# Altium PCB PCB-NW0101 Rev.B.PcbDoc (part 2 of 3)
Units mil, origin at the board's own origin, x right, y up, seen from the top; angles counter-clockwise.
Board outline 787.4 x 1377.95 mil, 6 copper layers (Top, GND, Inner3, Inner4, PWR, Bottom), stack 29.136 mil thick; 119 components, 126 nets, 561 pads, 474 vias.
Unrouted connection lines stored in the file: 214.
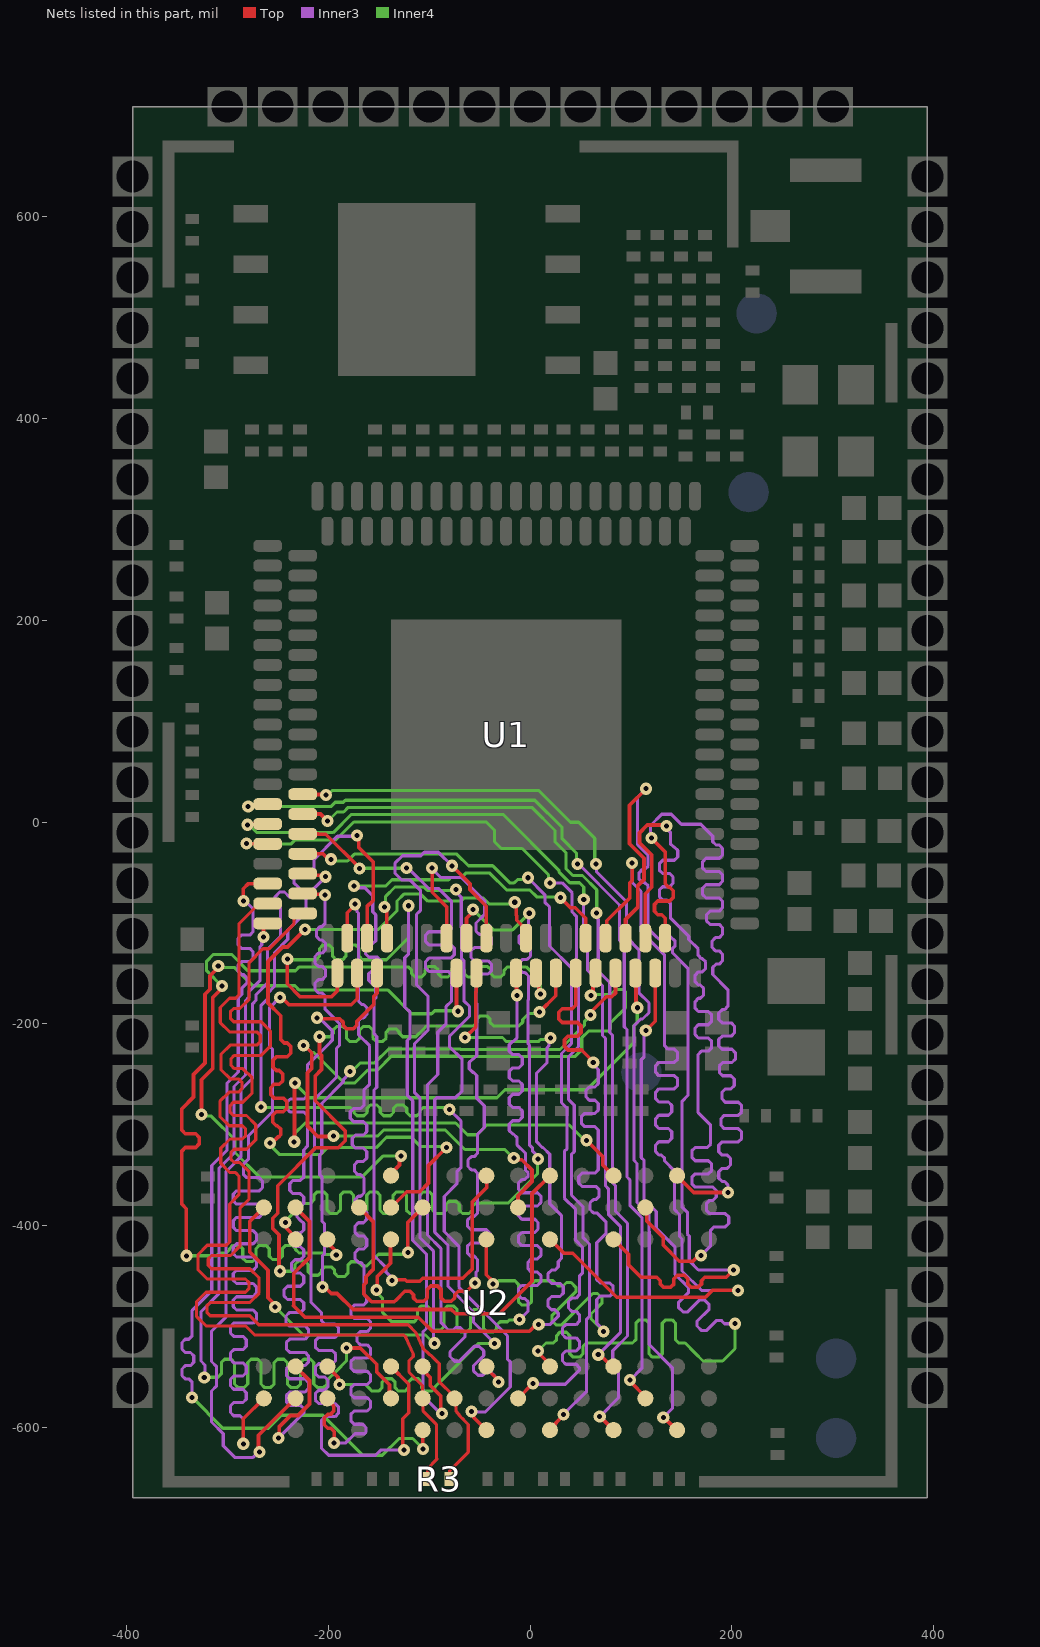
[diagram p6: the nets of this part, all layers, seen from the top]

## Via types
v1: diameter 12/12/12/12 (per signal layer), hole 5, Top to Bottom, tented both sides, 474 vias

## Nets (pads, with @x,y where several pads share a name; then routed paths per layer and width w, separated by ;. In a path a pad name is that pad's centre, name@x,y a point inside that pad or via, vN(x,y) a via of type N, cw(c..) or ccw(c..) an arc to the next point about the centre after c; other vN are vias at no path point) (continued)
DDR_A4: U1.82 U2.N8 | length 906.7
  Top w3.63: U2.N8@-200.79,-570.87 -200.79,-571.79 -200.79,-572.26 -194.45,-578.6 -194.45,-583.55 -197.73,-586.83 -200.46,-586.83 -203.87,-590.24 -203.87,-597.05 -200.46,-600.46 -197.28,-600.46 -193.87,-603.87 -193.87,-605.69 -193.87,-614.65 v1(-194.22,-615) ; U1.82@-181.1,-114.96 -181.1,-89.82 -173.3,-82.02 v1(-173.3,-81.43)
  Inner3 w3.1: v1(-194.22,-615) -182.41,-615 -173.41,-606 -164,-606 -162.45,-604.45 -162.45,-599.82 -165.72,-596.54 -174.24,-596.54 -177.51,-593.27 -177.51,-586.72 -174.24,-583.44 -161.37,-583.44 -158.1,-580.16 -158.1,-573.61 -161.37,-570.34 -174.24,-570.34 -177.51,-567.06 -177.51,-560.51 -174.24,-557.24 -161.37,-557.24 -158.1,-553.96 -158.1,-547.41 -161.37,-544.14 -174.24,-544.14 -177.51,-540.86 -177.51,-534.31 -174.24,-531.03 -161.37,-531.03 -158.1,-527.76 -158.1,-521.21 -161.37,-517.93 -168.17,-517.93 -171.45,-514.66 -171.45,-508.11 -168.17,-504.83 -161.37,-504.83 -158.1,-501.56 -158.1,-495 -161.37,-491.73 -174.24,-491.73 -177.51,-488.45 -177.51,-481.9 -174.24,-478.63 -165.01,-478.63 -161.73,-475.35 -161.73,-471 -164.56,-468.18 -164.56,-441.05 -164.56,-439.5 -167.83,-436.23 -170.05,-436.23 -173.33,-432.95 -173.33,-426.4 -170.05,-423.13 -165.01,-423.13 -161.73,-419.85 -161.73,-413.3 -165.01,-410.02 -170.05,-410.02 -173.33,-406.75 -173.33,-400.2 -170.05,-396.92 -165.01,-396.92 -161.73,-393.65 -161.73,-387.1 -165.01,-383.82 -170.05,-383.82 -173.33,-380.55 -173.33,-373.99 -170.05,-370.72 -167.83,-370.72 -164.56,-367.44 -164.56,-358.25 -164.56,-354.14 -164.56,-352.58 -167.83,-349.31 -170.62,-349.31 -173.9,-346.03 -173.9,-339.48 -170.62,-336.21 -165.01,-336.21 -161.73,-332.93 -161.73,-326.38 -165.01,-323.11 -172.9,-323.11 -176.17,-319.83 -176.17,-313.28 -172.9,-310 -165.01,-310 -161.73,-306.73 -161.73,-300.18 -165.01,-296.9 -174.82,-296.9 -178.09,-293.63 -178.09,-287.08 -174.82,-283.8 -167.83,-283.8 -164.56,-280.53 -164.56,-271.58 -164.56,-265.34 -158.96,-259.74 -158.96,-221.71 -168.89,-211.78 -169.97,-210.69 -169.97,-197.12 -166.7,-193.85 -164.86,-193.85 -161.58,-190.57 -161.58,-184.02 -164.86,-180.75 -166.7,-180.75 -169.97,-177.47 -169.97,-132.12 -169.97,-90.08 -171.6,-88.45 -171.6,-83.13 v1(-173.3,-81.43)
DDR_A5: U1.93 U2.N3 | length 848.8
  Top w3.63: v1(-340.5,-429.71) -340.5,-383.05 -344.89,-378.66 -344.89,-341.29 -344.89,-325.84 -341.48,-322.43 -331.24,-322.43 -327.84,-319.02 -327.84,-312.2 -331.24,-308.79 -341.48,-308.79 -344.89,-305.39 -344.89,-298.4 -344.89,-283.98 -333.41,-272.5 -333.41,-250.13 -321.94,-238.65 -321.94,-170.72 -317.02,-165.8 -317.02,-152.2 -308.86,-144.04 v1(-308.86,-142.66) ; U2.N3@-200.09,-413 -200.09,-417.43 -193.58,-423.94 -193.58,-427.52 v1(-191.98,-429.12) ; U1.93@-72.83,-149.6 -72.83,-186.18 v1(-71.54,-187.47)
  Inner4 w3.09: v1(-340.5,-429.71) -310.71,-429.71 -308,-427 -302.47,-427 -300.93,-427 -297.66,-423.73 -297.66,-422.71 -294.38,-419.44 -287.84,-419.44 -284.57,-422.71 -284.57,-432.1 -281.3,-435.37 -274.75,-435.37 -271.48,-432.1 -271.48,-422.71 -268.21,-419.44 -261.67,-419.44 -258.4,-422.71 -258.4,-430.19 -255.12,-433.46 -248.58,-433.46 -245.31,-430.19 -245.31,-422.71 -242.04,-419.44 -235.49,-419.44 -232.22,-422.71 -232.22,-423.73 -228.95,-427 -227.29,-427 -204.15,-427 -202.61,-428.54 -192.55,-428.54 v1(-191.98,-429.12) ; v1(-308.86,-142.66) -307.52,-144 -292.88,-144 -274.65,-162.22 -232.81,-162.22 -228.47,-166.57 -140.54,-166.57 -128.96,-178.15 -128.96,-178.37 -117.38,-189.95 -97.44,-189.95 -94.4,-186.91 -72.1,-186.91 v1(-71.54,-187.47)
DDR_A6: U1.86 U2.N7 | length 866.7
  Top w3.63: U2.N7@-200.6,-539.62 -200.54,-539.62 -190.19,-549.97 -190.19,-555.64 v1(-188.59,-557.24) ; v1(-144.31,-84.25) -144.31,-86.51 -142.03,-88.79 -142.03,-114.67 U1.86@-141.73,-114.96
  Inner3 w3.1: v1(-73.29,-66.86) -73.29,-69.27 -68.11,-74.45 -68.11,-104.64 -68,-104.75 -68,-134.94 -65.54,-137.4 -65.54,-177.14 -59.99,-182.69 -59.99,-192.55 -79.94,-212.5 -79.94,-222.36 -67.27,-235.03 -67.27,-266.53 -73.93,-273.19 -92.53,-273.19 -94.45,-275.11 -94.45,-406.24 -81.28,-419.4 -81.28,-460.05 -56,-485.33 -56,-495.63 v1(-35,-516.63)
  Inner4 w3.09: v1(-188.59,-557.24) -177.71,-557.24 -163.08,-557.24 -159.81,-560.51 ; -159.81,-560.55 -156.54,-563.82 -150,-563.82 -146.73,-560.55 -146.73,-554.85 -143.45,-551.57 -136.91,-551.57 -133.64,-554.85 -133.64,-560.55 -130.37,-563.82 -123.82,-563.82 -120.55,-560.55 -120.55,-554.85 -117.28,-551.57 -110.74,-551.57 -107.47,-554.85 -107.47,-560.55 -104.19,-563.82 -97.65,-563.82 -94.38,-560.55 -94.38,-559.67 -87.13,-552.42 -51.34,-516.63 v1(-35,-516.63) ; v1(-144.31,-84.25) -143.1,-83.05 -143.1,-73.62 -133.81,-64.33 -105.23,-64.33 -101.68,-67.89 -74.33,-67.89 v1(-73.29,-66.86)
DDR_A7: U1.95 U2.P2 | length 872.7
  Top w3.63: -234.29,-479.29 -222.95,-490.62 -110.64,-490.62 -96.68,-504.57 -0.63,-504.57 6.3,-497.64 v1(8.57,-497.64) ; -234,-479 -234,-446.92 -218.47,-431.38 -218.47,-395.71 U2.P2@-232.28,-381.89 ; v1(-64.35,-213.53) -53.77,-202.96 -53.77,-168 -53.15,-167.38 U1.95@-53.15,-149.6
  Inner3 w3.1: v1(8.57,-497.64) 19.98,-497.64 27.96,-489.66 27.96,-488.01 27.96,-486.46 24.68,-483.18 21.23,-483.18 17.96,-479.91 17.96,-473.36 21.23,-470.08 29.65,-470.08 32.92,-466.8 32.92,-460.25 29.65,-456.98 21.23,-456.98 17.96,-453.7 17.96,-447.15 21.23,-443.88 24.68,-443.88 27.96,-440.6 27.96,-438.96 27.96,-435.5 31,-432.45 31,-389.7 19.56,-378.26 19.56,-329.18 12.79,-322.41 12,-322.41 6.49,-316.91 6.49,-248.64 16.93,-238.21 16.93,-223.48 18.61,-221.8 18.61,-215.51 v1(20.31,-213.81)
  Inner4 w3.09: v1(-64.35,-213.53) -27.33,-213.53 -23.29,-217.57 8.14,-217.57 10.19,-215.51 18.6,-215.51 v1(20.31,-213.81)
DDR_A8: U1.84 U2.P8 | length 945.7
  Top w3.63: v1(-268.07,-624.19) -269,-623.26 -269,-607.58 -233,-571.58 U2.P8@-233,-570 ; v1(-171.39,-13.19) -169.79,-14.79 -169.79,-25.21 -155.35,-39.65 -155.35,-77.66 -161.42,-83.72 U1.84@-161.42,-114.96
  Inner3 w3.1: v1(-268.07,-624.19) -269.15,-624.19 -274.34,-629.37 -292.63,-629.37 -303.93,-618.07 -303.93,-605.99 -315.55,-594.37 -315.55,-563.63 -310.45,-558.53 -310.45,-539.47 -315.55,-534.37 -315.55,-504.4 -301.1,-489.95 -301.1,-346.19 -286.16,-331.24 -286.16,-264.92 -274.8,-253.56 -274.8,-179.95 -271.45,-176.6 -271.45,-171.05 -260.25,-159.85 -260.25,-126.3 -247.14,-113.2 -247.14,-90.86 -247.14,-84.03 -252.54,-78.64 -252.54,-74 -247.91,-69.37 -243.27,-69.37 -238.16,-74.49 -233.53,-74.49 -228.9,-69.85 -228.9,-65.22 -234.01,-60.11 -234.01,-55.48 -229.38,-50.84 -224.74,-50.84 -220.61,-54.98 -215.98,-54.98 -214,-53 -214,-37.24 -190.87,-14.12 -172.32,-14.12 v1(-171.39,-13.19)
DDR_A9: U1.94 U2.P3 | length 862.1
  Top w3.63: -240.85,-402.93 -233,-410.77 U2.P3@-233,-413 ; U1.94@-62.99,-114.96 -62.99,-95.33 -56.56,-88.9 v1(-56.56,-86.81)
  Inner3 w3.1: v1(-0.8,-90.36) -1.54,-91.11 -1.54,-102 -1.54,-106.63 -4.82,-109.91 -7.37,-109.91 -10.64,-113.18 -10.64,-119.73 -7.37,-123.01 -2.89,-123.01 0.38,-126.28 0.38,-132.84 -2.89,-136.11 -7.37,-136.11 -10.64,-139.39 -10.64,-145.94 -7.37,-149.21 -4.82,-149.21 -1.54,-152.49 -1.54,-154.04 -1.54,-176.45 -2.2,-177.11 -2.2,-219.13 -0.61,-220.72 -0.61,-319.85 2.56,-323.02 2.56,-326.1 8.01,-331.55 v1(8.01,-333.96)
  Inner4 w3.09: v1(-242.45,-396.81) -242.45,-395.45 -224.74,-377.74 -218.94,-377.74 -217.39,-377.74 -214.12,-374.47 -214.12,-369.63 -210.85,-366.36 -204.31,-366.36 -201.04,-369.63 -201.04,-384.47 -197.76,-387.74 -191.22,-387.74 -187.95,-384.47 -187.95,-369.63 -184.68,-366.36 -178.13,-366.36 -174.86,-369.63 -174.86,-384.47 -171.59,-387.74 -165.05,-387.74 -161.78,-384.47 -161.78,-369.63 -158.51,-366.36 -151.96,-366.36 -148.69,-369.63 -148.69,-384.47 -145.42,-387.74 -138.88,-387.74 -135.6,-384.47 -135.6,-369.63 -132.33,-366.36 -125.79,-366.36 -122.52,-369.63 -122.52,-384.47 -119.25,-387.74 -112.7,-387.74 -109.43,-384.47 -109.43,-369.63 -106.16,-366.36 -99.62,-366.36 -96.34,-369.63 -96.34,-384.47 -93.07,-387.74 -86.53,-387.74 -83.26,-384.47 -83.26,-378.91 -79.99,-375.64 -73.44,-375.64 -70.17,-378.91 -70.17,-384.47 -66.9,-387.74 -60.36,-387.74 -57.09,-384.47 -57.09,-380.78 -53.81,-377.5 -23.53,-377.46 -21.99,-377.46 -21.63,-377.46 7.42,-348.4 7.42,-334.55 v1(8.01,-333.96) ; v1(-56.56,-86.81) -56.43,-86.81 -36.44,-106.8 -17.23,-106.8 v1(-0.8,-90.36)
DDR_A10: U1.92 U2.M2 | length 901
  Top w3.63: U2.M2@-166,-383 -166,-385.18 -155.47,-395.71 -155.47,-443.38 -162.51,-450.42 -162.51,-456.3 -164.82,-458.61 -164.82,-467.5 -156.97,-475.35 -134.54,-475.35 -132.86,-473.68 -124,-464.82 -118.92,-464.82 -115.51,-468.23 -115.51,-471.41 -112.11,-474.82 -105.29,-474.82 -101.88,-471.41 -101.88,-463.04 -98.47,-459.63 -91.65,-459.63 -88.25,-463.04 -88.25,-471.41 -84.84,-474.82 -78.02,-474.82 -74.61,-471.41 -74.61,-468.23 -71.2,-464.82 -69.38,-464.82 -62.69,-464.82 v1(-54.58,-456.72) ; v1(-97,-45.7) -97,-69.6 -82.68,-83.91 U1.92@-82.68,-114.96
  Inner3 w3.1: v1(-97,-45.7) -97,-46.22 -88.31,-54.91 -68.18,-54.91 -44.9,-78.19 -44.9,-91.49 -53.51,-100.1 -53.51,-102.54 -53.51,-108.04 -50.23,-111.32 -41.52,-111.32 -38.25,-114.6 -38.25,-121.15 -41.52,-124.42 -55.16,-124.42 -58.44,-127.7 -58.44,-134.25 -55.16,-137.52 -41.52,-137.52 -38.25,-140.8 -38.25,-147.35 -41.52,-150.62 -50.23,-150.62 -53.51,-153.9 -53.51,-168.55 -53.51,-179.13 -52.8,-179.84 -52.8,-224.05 -52.8,-231.5 -56.07,-234.78 -56.89,-234.78 -60.17,-238.05 -60.17,-244.6 -56.89,-247.88 -56.07,-247.88 -52.8,-251.15 -52.8,-252.7 -52.8,-273.65 -45.41,-281.04 -45.41,-302.68 -52.03,-309.3 -52.03,-314 -52.03,-328.17 -55.3,-331.44 -58.13,-331.44 -61.41,-334.72 -61.41,-341.27 -58.13,-344.54 -55.3,-344.54 -52.03,-347.82 -52.03,-349.37 -52.03,-374.22 -52.03,-387.56 -55.3,-390.84 -58.56,-390.84 -61.83,-394.11 -61.83,-400.67 -58.56,-403.94 -43.08,-403.94 -39.8,-407.22 -39.8,-413.77 -43.08,-417.04 -58.75,-417.04 -62.03,-420.32 -62.03,-426.87 -58.75,-430.14 -55.3,-430.14 -52.03,-433.42 -52.03,-434.97 -52.03,-444.51 -53.58,-446.06 -53.58,-455.71 v1(-54.58,-456.72)
DDR_A11: U1.85 U2.P7 | length 906.1
  Top w3.63: v1(-249.29,-610.29) -248.3,-609.3 -248.3,-598.84 -237.42,-587.95 -229.83,-587.95 -218.47,-576.59 -218.47,-553.19 U2.P7@-233,-538.65 ; v1(-210.91,-193.93) -210.02,-194.82 -204.06,-194.82 -188.61,-194.82 -185.2,-198.23 -185.2,-201.41 -181.79,-204.82 -174.97,-204.82 -171.57,-201.41 -171.57,-197.57 -159.03,-185.03 -154.75,-180.75 -154.75,-172.85 -151.58,-169.68 U1.85@-151.58,-149.6
  Inner3 w3.1: v1(-249.29,-610.29) -224.2,-585.2 -224.2,-582.58 -224.2,-581.03 -227.47,-577.75 -238.09,-577.75 -241.36,-574.48 -241.36,-567.93 -238.09,-564.65 -222.85,-564.65 -219.58,-561.38 -219.58,-554.83 -222.85,-551.55 -238.09,-551.55 -241.36,-548.28 -241.36,-541.73 -238.09,-538.45 -222.85,-538.45 -219.58,-535.18 -219.58,-528.62 -222.85,-525.35 -238.09,-525.35 -241.36,-522.07 -241.36,-515.52 -238.09,-512.25 -222.85,-512.25 -219.58,-508.97 -219.58,-502.42 -222.85,-499.15 -238.48,-499.15 -241.76,-495.87 -241.76,-489.32 -238.48,-486.04 -227.47,-486.04 -224.2,-482.77 -224.2,-476.22 -227.47,-472.94 -240.3,-472.94 -243.57,-469.67 -243.57,-463.12 -240.3,-459.84 -227.47,-459.84 -224.2,-456.57 -224.2,-450.02 -227.47,-446.74 -232.87,-446.74 -236.15,-443.46 -236.15,-436.91 -232.87,-433.64 -227.47,-433.64 -224.2,-430.36 -224.2,-423.81 -227.47,-420.54 -233.46,-420.54 -236.74,-417.26 -236.74,-410.71 -233.46,-407.44 -227.47,-407.44 -224.2,-404.16 -224.2,-397.61 -227.47,-394.33 -227.62,-394.33 -230.9,-391.06 -230.9,-384.51 -227.62,-381.23 -227.47,-381.23 -224.2,-377.96 -224.2,-371.41 -227.47,-368.13 -234.8,-368.13 -238.08,-364.86 -238.08,-358.3 -234.8,-355.03 -227.47,-355.03 -224.2,-351.75 -224.2,-331.14 -224.2,-324.85 -220.58,-321.23 -220.58,-318.46 -220.58,-290.71 -223.85,-287.43 -237.43,-287.43 -240.7,-284.16 -240.7,-277.61 -237.43,-274.33 -223.85,-274.33 -220.58,-271.06 -220.58,-260.19 -220.58,-241.02 -197.96,-218.4 -197.96,-218.27 -195.95,-216.26 -195.95,-206.94 -208.96,-193.93 v1(-210.91,-193.93)
DDR_A12: U1.96 U2.R2 | length 950.4
  Top w3.63: U2.R2@-264,-382 -264,-382.11 -277.6,-395.71 -277.6,-425.92 -259.52,-444 -259.52,-471.27 -252.45,-478.34 v1(-252.45,-480.4) ; v1(-77.37,-43.36) -59.54,-61.19 -59.54,-67.13 -43.31,-83.36 U1.96@-43.31,-114.96
  Inner3 w3.1: v1(-94.57,-516.39) -95.49,-515.47 -95.49,-425.29 -109.12,-411.65 -109.12,-273.26 -114.55,-267.82 -114.55,-219.89 -101.05,-206.38 -101.05,-172.64 -112.45,-161.23 -112.45,-91.52 -108.68,-87.75 -108.68,-67.55 -118.71,-57.52 -126.83,-57.52 -133.87,-50.49 -133.87,-40.92 -126.4,-33.45 -108.15,-33.45 -104.64,-29.95 -90.78,-29.95 v1(-77.37,-43.36)
  Inner4 w3.09: v1(-252.45,-480.4) -224.72,-508.13 -103.52,-508.13 -95.27,-516.39 v1(-94.57,-516.39)
DDR_A13: U1.83 U2.R8 | length 946.1
  Top w3.63: v1(-284.08,-615.96) -284,-615.88 -284,-591.09 U2.R8@-263.91,-571 ; v1(-247.78,-173.77) -246.06,-173.77 -238.82,-181 -177.06,-181 -171.26,-175.2 U1.83@-171.26,-149.6
  Inner3 w3.1: v1(-284.08,-615.96) -284,-615.88 -284,-592.99 -284,-591.44 -287.28,-588.16 -293.49,-588.16 -296.76,-584.89 -296.76,-578.34 -293.49,-575.06 -284.38,-575.06 -281.1,-571.79 -281.1,-565.24 -284.38,-561.96 -293.49,-561.96 -296.76,-558.68 -296.76,-552.13 -293.49,-548.86 -284.38,-548.86 -281.1,-545.58 -281.1,-539.03 -284.38,-535.76 -293.49,-535.76 -296.76,-532.48 -296.76,-525.93 -293.49,-522.66 -284.38,-522.66 -281.1,-519.38 -281.1,-512.83 -284.38,-509.55 -293.49,-509.55 -296.76,-506.28 -296.76,-499.73 -293.49,-496.45 -274.38,-496.45 -271.1,-493.18 -271.1,-486.63 -274.38,-483.35 -290.72,-483.35 -294,-480.08 -294,-473.52 -290.72,-470.25 -274.38,-470.25 -271.1,-466.97 -271.1,-460.42 -274.38,-457.15 -290.72,-457.15 -294,-453.87 -294,-447.32 -290.72,-444.05 -274.38,-444.05 -271.1,-440.77 -271.1,-434.22 -274.38,-430.94 -290.72,-430.94 -294,-427.67 -294,-421.12 -290.72,-417.84 -274.38,-417.84 -271.1,-414.57 -271.1,-408.02 -274.38,-404.74 -290.72,-404.74 -294,-401.47 -294,-394.92 -290.72,-391.64 -268.28,-391.64 -265.01,-388.37 -265.01,-381.81 -268.28,-378.54 -290.72,-378.54 -294,-375.26 -294,-368.71 -290.72,-365.44 -268.28,-365.44 -265.01,-362.16 -265.01,-355.61 -268.28,-352.34 -280.72,-352.34 -284,-349.06 -284,-341 -284,-339.13 -279.06,-334.18 -279.06,-311.07 -255.11,-287.11 -255.11,-224.84 -257.93,-222.01 -257.93,-183.92 v1(-247.78,-173.77)
DDR_BA0: U1.100 U2.L2 | length 855.9
  Top w3.63: v1(-257.76,-317.8) -255.5,-317.8 -249.64,-311.94 -249.12,-311.94 -246.99,-309.81 -246.99,-306 -246.99,-304.18 -250.4,-300.77 -251.43,-300.77 -254.84,-297.37 -254.84,-290.55 -251.43,-287.14 -244.44,-287.14 -241.03,-283.73 -241.03,-276.91 -244.44,-273.51 -253.58,-273.51 -256.99,-270.1 -256.99,-263.28 -253.58,-259.87 -248.39,-259.87 -244.98,-256.46 -244.98,-249.65 -248.39,-246.24 -251.15,-246.24 -254.56,-242.83 -254.56,-236.01 -251.15,-232.6 -240.4,-232.6 -236.99,-229.19 -236.99,-222.38 -240.4,-218.97 -243.58,-218.97 -246.99,-215.56 -246.99,-196.08 -246.99,-191.99 -259.6,-179.37 -259.6,-138.28 -245.08,-123.76 -240.28,-123.76 v1(-222.99,-106.47) ; U2.L2@-137,-381.09 -122.27,-366.36 -109.33,-366.36 -100.53,-357.55 -100.53,-340.25 v1(-82.9,-322.62) ; v1(-15.14,-79.49) -13.54,-81.09 -13.54,-92.49 -13.27,-92.76 -13.27,-97.36 -3.94,-106.69 U1.100@-3.94,-114.96
  Inner4 w3.09: v1(-257.76,-317.8) -257.76,-319.77 -248.03,-329.5 -207.97,-329.5 -200.98,-322.51 -152.44,-322.51 -142.22,-312.29 -117.81,-312.29 -108.74,-321.37 -84.15,-321.37 v1(-82.9,-322.62) ; v1(-222.99,-106.47) -150.2,-106.47 -131.78,-88.05 -131.78,-78.18 -125.01,-71.42 -108.17,-71.42 -101.19,-78.4 -68.51,-78.4 -65.27,-75.16 -46.54,-75.16 -40.51,-81.2 -16.85,-81.2 v1(-15.14,-79.49)
DDR_BA1: U1.99 U2.L3 | length 883.1
  Top w3.63: v1(-152.2,-463.41) -151.44,-462.65 -151.44,-450.14 -138.31,-437.01 -138.31,-414.31 U2.L3@-137.8,-413.8 ; U1.99@-13.78,-149.6 -11.81,-151.58 -13.44,-153.2 -13.44,-171.32 v1(-13.09,-171.66)
  Inner3 w3.1: v1(-13.09,-171.66) -13.09,-189.99 -13.09,-214.04 -16.37,-217.31 -17.27,-217.31 -20.54,-220.59 -20.54,-227.14 -17.27,-230.41 -10.99,-230.41 -7.71,-233.69 -7.71,-240.24 -10.99,-243.52 -17.27,-243.52 -20.54,-246.79 -20.54,-253.34 -17.27,-256.62 -10.99,-256.62 -7.71,-259.89 -7.71,-266.44 -10.99,-269.72 -17.27,-269.72 -20.54,-272.99 -20.54,-279.55 -17.27,-282.82 -10.99,-282.82 -7.71,-286.1 -7.71,-292.65 -10.99,-295.92 -17.27,-295.92 -20.54,-299.2 -20.54,-305.75 -17.27,-309.02 -16.37,-309.02 -13.09,-312.3 -13.09,-313.85 -13.09,-319.58 -4.54,-328.13 -4.54,-344.96 -1.94,-347.56 -1.94,-350.89 -5.21,-354.17 -8.14,-354.17 -11.42,-357.44 -11.42,-363.99 -8.14,-367.27 7.4,-367.27 10.67,-370.54 10.67,-377.1 7.4,-380.37 -8.14,-380.37 -11.42,-383.65 -11.42,-390.2 -8.14,-393.47 4.62,-393.47 7.9,-396.75 7.9,-403.3 4.62,-406.57 -8.14,-406.57 -11.42,-409.85 -11.42,-416.4 -8.14,-419.68 7.4,-419.68 10.67,-422.95 10.67,-429.5 7.4,-432.78 1.34,-432.78 -1.94,-436.05 -1.94,-442.6 1.34,-445.88 7.4,-445.88 10.67,-449.15 10.67,-455.7 7.4,-458.98 -8.14,-458.98 -11.42,-462.26 -11.42,-468.81 -8.14,-472.08 -5.21,-472.08 -1.94,-475.36 -1.94,-476.91 -1.94,-484.43 v1(-10.26,-492.76)
  Inner4 w3.09: v1(-152.2,-463.41) -152.2,-465.82 -146,-472.02 -146,-486 -145.36,-486.64 -137,-495 -114.72,-495 -111.45,-491.73 -111.45,-482.9 -108.18,-479.63 -101.64,-479.63 -98.37,-482.9 -98.37,-500 -95.09,-503.27 -88.55,-503.27 -85.28,-500 -85.28,-482.9 -82.01,-479.63 -75.46,-479.63 -72.19,-482.9 -72.19,-501.73 -68.92,-505 -62.38,-505 -59.11,-501.73 -59.11,-486.28 -55.83,-483.01 -49.29,-483.01 -46.02,-486.28 -46.02,-501.73 -42.75,-505 -36.21,-505 -32.93,-501.73 -32.93,-498.27 -29.66,-495 -28.12,-495 -22.44,-495 -20.89,-493.46 -10.96,-493.46 v1(-10.26,-492.76)
DDR_BA2: U1.101 U2.L1 | length 862.2
  Top w3.63: v1(-325.43,-289.65) -325.43,-255.26 -314.3,-244.13 -314.3,-173.88 -305.2,-164.78 v1(-305.2,-162.62) ; U2.L1@-137,-350 -137,-347.42 -129.37,-339.79 -129.37,-332.58 v1(-127.77,-330.98) ; U1.101@5.91,-149.6 8.56,-152.26 8.56,-166.35 10.23,-168.02 v1(10.23,-170.28)
  Inner4 w3.09: v1(-325.43,-289.65) -323.73,-291.36 -315.64,-291.36 -292.32,-314.68 -292.32,-327.45 -268.29,-351.48 -166.31,-351.48 -145.81,-330.98 v1(-127.77,-330.98) ; v1(-305.2,-162.62) -320.4,-147.45 -320.4,-137.88 -313.64,-131.12 -295.73,-131.12 -279.53,-147.33 -232.32,-147.33 -228.48,-143.49 -135.15,-143.49 -120.52,-143.49 -117.25,-146.76 -117.25,-150.21 -113.98,-153.49 -107.43,-153.49 -104.16,-150.21 -104.16,-146.49 -100.89,-143.22 -94.35,-143.22 -91.08,-146.49 -91.08,-150.21 -87.81,-153.49 -81.26,-153.49 -77.99,-150.21 -77.99,-146.49 -74.72,-143.22 -68.18,-143.22 -64.9,-146.49 -64.9,-150.21 -61.63,-153.49 -55.09,-153.49 -51.82,-150.21 -51.82,-146.49 -48.55,-143.22 -42,-143.22 -38.73,-146.49 -38.73,-150.21 -35.46,-153.49 -28.92,-153.49 -25.64,-150.21 -25.64,-146.76 -22.37,-143.49 -6.54,-143.49 -3.83,-143.49 10.23,-157.55 v1(10.23,-170.28)
DDR_CAS: U1.75 U2.L7 | length 921.9
  Top w3.63: U1.75@-225.2,-70.86 -224.54,-71.52 -203.66,-71.52 v1(-203,-72.18) ; U2.L7@-138.17,-539 -120.12,-557.05 -120.12,-585.22 -126,-591.1 -126,-621 v1(-124.81,-622.19)
  Inner3 w3.1: v1(-203,-72.18) -203,-80 -203,-100.46 -206.28,-103.74 -208.17,-103.74 -211.45,-107.01 -211.45,-113.56 -208.17,-116.84 -205.94,-116.84 -202.67,-120.11 -202.67,-126.67 -205.94,-129.94 -209.72,-129.94 -213,-133.22 -213,-139.77 -209.72,-143.04 -205.94,-143.04 -202.67,-146.32 -202.67,-152.87 -205.94,-156.14 -209.72,-156.14 -213,-159.42 -213,-165.97 -209.72,-169.25 -206.28,-169.25 -203,-172.52 -203,-185.51 -191.51,-197 -188.84,-199.66 -188.84,-221.4 -191.69,-224.24 -191.69,-252.69 -213.48,-274.48 -213.48,-324.17 -217.09,-327.79 -217.09,-475.46 -206.55,-486 -206.55,-494.09 -203.28,-497.36 -193.12,-497.36 -189.84,-500.64 -189.84,-507.19 -193.12,-510.46 -209.36,-510.46 -212.63,-513.74 -212.63,-520.29 -209.36,-523.56 -195.83,-523.56 -192.55,-526.84 -192.55,-533.39 -195.83,-536.67 -209.36,-536.67 -212.63,-539.94 -212.63,-546.49 -209.36,-549.77 -203.42,-549.77 -200.14,-553.04 -200.14,-559.59 -203.42,-562.87 -209.36,-562.87 -212.63,-566.14 -212.63,-572.7 -209.36,-575.97 -193.12,-575.97 -189.84,-579.25 -189.84,-585.8 -193.12,-589.07 -203.28,-589.07 -206.55,-592.35 -206.55,-607 -206.55,-620.37 -199.58,-627.34 -153.09,-627.34 -147.93,-622.19 v1(-124.81,-622.19)
DDR_CKE: U1.103 U2.K2 | length 852
  Top w3.63: v1(-247.7,-445) -248.7,-444 -248.7,-408.93 -249.96,-407.66 -254.98,-402.64 -254.98,-392.63 -249.96,-387.61 -249.96,-360.2 -212.55,-322.79 -189.93,-322.79 -183.01,-315.86 -183.01,-306.07 -212.83,-276.25 -212.83,-251.53 -206.52,-245.21 -206.52,-231.1 -208.56,-229.05 v1(-208.56,-212.67) ; v1(-121.07,-426.57) -121,-426.5 -121,-396.59 -109,-384.59 U2.K2@-109,-384 ; v1(9.35,-188.26) 25.59,-172.02 U1.103@25.59,-149.6
  Inner4 w3.09: v1(-247.7,-445) -237.66,-445 -236.12,-445 -232.85,-441.73 -232.85,-438.27 -229.58,-435 -223.03,-435 -219.76,-438.27 -219.76,-445.74 -216.49,-449.02 -209.95,-449.02 -206.68,-445.74 -206.68,-443.93 -203.4,-440.66 -196.86,-440.66 -193.59,-443.93 -193.59,-447.07 -190.32,-450.34 -183.77,-450.34 -180.5,-447.07 -180.5,-438.92 -177.23,-435.65 -170.69,-435.65 -166.45,-439.89 -161.82,-439.89 -156.48,-434.55 -150.14,-428.2 -122.7,-428.2 v1(-121.07,-426.57) ; v1(-208.56,-212.67) -199.78,-212.67 -198.24,-212.67 -194.96,-209.4 -194.96,-205.94 -191.69,-202.67 -185.15,-202.67 -181.88,-205.94 -181.88,-214.21 -178.61,-217.49 -172.06,-217.49 -168.79,-214.21 -168.79,-205.94 -165.52,-202.67 -158.98,-202.67 -155.71,-205.94 -155.71,-214.05 -152.43,-217.32 -145.89,-217.32 -142.62,-214.05 -142.62,-208.17 -139.35,-204.9 -132.8,-204.9 -129.53,-208.17 -129.53,-209.4 -126.26,-212.67 -113.2,-212.67 -105.56,-205.03 -102.52,-201.99 -57.4,-201.99 -55.85,-201.99 -52.58,-198.72 -52.58,-195.26 -49.31,-191.99 -42.77,-191.99 -39.49,-195.26 -39.49,-198.72 -36.22,-201.99 -10.99,-201.99 -7.35,-198.35 -7.28,-198.28 -7.28,-195.66 -1.28,-189.66 7.95,-189.66 v1(9.35,-188.26)
DDR_CLK_N: R3.1 U1.76 U2.K8 | length 1067.8
  Top w3.12: U1.76@-259.84,-80.71 -268.11,-80.71 -288.44,-101.04 -288.44,-143.55 -288.44,-171.31 -291.72,-174.59 -297.72,-174.59 -306.93,-183.8 -306.93,-198.74 -297.72,-207.95 -270.6,-207.95 -267.32,-211.23 -267.32,-217.78 -270.6,-221.06 -297.1,-221.06 -306.31,-230.27 -306.31,-245.21 -297.1,-254.42 -288.7,-254.42 -285.42,-257.7 -285.42,-264.26 -288.7,-267.54 -298.07,-267.54 -307.27,-276.74 -307.27,-291.69 -298.07,-300.89 -285.06,-300.89 -281.78,-304.17 -281.78,-310.73 -285.06,-314.01 -297.24,-314.01 -306.45,-323.22 -306.45,-338.16 -297.24,-347.36 -291.72,-347.36 -288.44,-350.64 -288.44,-369.32 -297.52,-378.4 -297.52,-388.93 -297.52,-389 -297.52,-416.05 -300.8,-419.33 -319.73,-419.33 -328.94,-428.54 -328.94,-443.48 -319.73,-452.68 -281.82,-452.68 -278.54,-455.96 -278.54,-462.52 -281.82,-465.8 -321.07,-465.8 -330.27,-475.01 -330.27,-489.95 -321.07,-499.16 -281.84,-499.16 -280.28,-500.72 -272.88,-508.12 -260.51,-508.12 -125,-508.12 -123.17,-509.95 -115.68,-526.99 -115.68,-529.57 -116.59,-530.49 -119.86,-533.75 -119.86,-544.99 -106.66,-558.19 -106.66,-570.51 U2.K8@-106.3,-570.87 -105.94,-571.22 -105.94,-583.54 -92.74,-596.75 -92.74,-630.26 -92,-631 -92.91,-631.91 -101.38,-640.38 R3.1@-101.38,-652.87
DDR_CLK_P: R3.2 U1.77 U2.J8 | length 1076.6
  Top w3.12: U1.77@-225.2,-90.55 -229.84,-90.55 -234,-94.7 -234,-101.13 -258.45,-125.59 -264.65,-125.59 -278.32,-139.26 -278.32,-143.55 -278.32,-175.5 -287.53,-184.71 -293.53,-184.71 -296.81,-187.99 -296.81,-194.55 -293.53,-197.83 -266.41,-197.83 -257.2,-207.03 -257.2,-221.98 -266.41,-231.18 -292.91,-231.18 -296.19,-234.46 -296.19,-241.02 -292.91,-244.3 -284.5,-244.3 -275.3,-253.51 -275.3,-268.45 -284.5,-277.66 -293.87,-277.66 -297.15,-280.93 -297.15,-287.49 -293.87,-290.77 -280.87,-290.77 -271.66,-299.98 -271.66,-314.92 -280.87,-324.13 -293.05,-324.13 -296.33,-327.41 -296.33,-333.97 -293.05,-337.25 -287.53,-337.25 -278.32,-346.45 -278.32,-373.51 -287.4,-382.6 -287.4,-388.93 -287.4,-389 -287.4,-420.24 -296.61,-429.45 -315.54,-429.45 -318.82,-432.73 -318.82,-439.29 -315.54,-442.57 -277.63,-442.57 -268.42,-451.77 -268.42,-466.71 -277.63,-475.92 -316.88,-475.92 -320.16,-479.2 -320.16,-485.76 -316.88,-489.04 -277.65,-489.04 -268.69,-498 -265.33,-498 -260.51,-498 -125,-498 -120.81,-498 -113.05,-505.75 -106.13,-521.18 -99.88,-527.43 cw(c-106.3,-539.37) -96.75,-529.74 -91.83,-534.6 -90,-536.43 -90,-554.32 U2.J8@-75.83,-568.49 ; R3.2@-79.72,-653.54 -79.72,-642.72 -61.24,-624.24 -61.24,-596.84 -65.1,-592.89 ccw(c-74.8,-602.36) -65.83,-592.2 -69.43,-588.6 -73.34,-583.54 -73.34,-582.25 -73.34,-572.33 U2.J8@-74.8,-570.87
DDR_CS: U1.78 U2.L8 | length 902.3
  Top w3.63: v1(-264.02,-113.75) -264.02,-104.3 -260.11,-100.39 U1.78@-259.84,-100.39 ; v1(-182,-521) -168.12,-521 -151.87,-537.26 -151.87,-544.84 -139.29,-557.41 -139.29,-567.71 U2.L8@-138,-569
  Inner3 w3.1: v1(-322.75,-550.21) -321.95,-549.42 -321.95,-538.01 -325.99,-533.98 -325.99,-484.99 -308.2,-467.21 -308.2,-343.25 -293.26,-328.3 -293.26,-261.98 -281.9,-250.62 -281.9,-177.01 -278.55,-173.66 -278.55,-168.11 -267.35,-156.91 -267.35,-123.36 -265.73,-121.74 -265.73,-115.45 v1(-264.02,-113.75)
  Inner4 w3.09: v1(-322.75,-550.21) -322.54,-550 -310.64,-550 -309.1,-550 -305.83,-546.73 -305.83,-535.45 -302.56,-532.18 -296.01,-532.18 -292.74,-535.45 -292.74,-556.73 -289.47,-560 -282.93,-560 -279.66,-556.73 -279.66,-535.45 -276.38,-532.18 -269.84,-532.18 -266.57,-535.45 -266.57,-556.73 -263.3,-560 -256.75,-560 -253.48,-556.73 -253.48,-535.45 -250.21,-532.18 -243.67,-532.18 -240.4,-535.45 -240.4,-556.73 -237.13,-560 -230.58,-560 -227.31,-556.73 -227.31,-535.45 -224.04,-532.18 -217.5,-532.18 -214.22,-535.45 -214.22,-556.73 -210.95,-560 -204.41,-560 -201.14,-556.73 -201.14,-553.14 -192,-544 -182,-534 v1(-182,-521)
DDR_D0: U1.71 U2.G8 | length 904.5
  Top w3.63: U1.71@-225.2,-31.49 -205.06,-31.49 -199.62,-36.94 v1(-197.36,-36.94) ; U2.G8@-11.81,-570.87 3,-556.05 v1(3,-556)
  Inner3 w3.1: v1(-2.02,-55.2) 14.7,-71.92 14.7,-79.48 19.32,-84.11 19.32,-122.82 40.96,-144.46 40.96,-219.53 31.13,-229.36 31.13,-277.98 33.64,-280.49 36.69,-283.54 36.69,-323.54 34.01,-326.22 34.01,-372.57 45.2,-383.76 45.2,-414.33 51.84,-420.96 51.84,-447.06 48.9,-450 48.9,-468.39 45.62,-471.67 41.38,-471.67 38.1,-474.94 38.1,-481.49 41.38,-484.77 45.62,-484.77 48.9,-488.04 48.9,-494.59 45.62,-497.87 35.46,-497.87 32.18,-501.14 32.18,-507.7 35.46,-510.97 45.62,-510.97 48.9,-514.25 48.9,-520.8 45.62,-524.07 35.46,-524.07 32.18,-527.35 32.18,-533.9 35.46,-537.17 45.62,-537.17 48.9,-540.45 48.9,-542 48.9,-543.1 35,-557 4,-557 v1(3,-556) v1@2,-555
  Inner4 w3.09: v1(-197.36,-36.94) -195.71,-38.58 -180.74,-38.58 -173.98,-31.82 -72.55,-31.82 -61,-43.37 -37.04,-43.37 -20.1,-60.31 -15.71,-60.31 -12.31,-56.91 -3.72,-56.91 v1(-2.02,-55.2)
DDR_D1: U1.107 U2.G2 | length 821.1
  Top w3.63: v1(-224.38,-221.26) -223.71,-221.26 -216.37,-228.61 -216.37,-244.26 -220.47,-248.36 -220.47,-301.24 -210.25,-311.46 -195.31,-311.46 v1(-194.82,-310.97) ; v1(-16.09,-332.91) -14.49,-334.51 -8.15,-334.51 2.01,-344.67 2.01,-356.12 -12,-370.12 U2.G2@-12,-375 ; v1(60.16,-171.81) 60.16,-169.55 62.3,-167.41 62.3,-152.26 U1.107@64.96,-149.6
  Inner4 w3.09: v1(-224.38,-221.26) -223.48,-221.26 -216.41,-228.33 -214.23,-228.33 -184.08,-258.48 -173.51,-258.48 -160.66,-245.63 -150.88,-245.63 -137.35,-232.09 -72.13,-232.09 -71.79,-232.44 44.36,-232.44 51.26,-225.54 51.26,-213.8 58.02,-207.04 77.85,-207.04 79.66,-205.23 79.66,-198.97 94.7,-183.93 94.7,-168.4 92.24,-165.95 84.79,-165.95 79.73,-171 60.98,-171 v1(60.16,-171.81) ; v1(-194.82,-310.97) -150.92,-310.97 -145.16,-305.21 -83.72,-305.21 -64.59,-324.34 -24.99,-324.34 -16.42,-332.91 v1(-16.09,-332.91)
DDR_D2: U1.69 U2.H7 | length 882.4
  Top w3.63: U1.69@-225.2,-11.81 -225.02,-11.63 -210,-11.63 ; -210,-12 -202.38,-12 -169.04,-45.34 v1(-169.04,-45.96) ; U2.H7@-43.31,-539.37 -43.31,-541 -31.21,-553.1 v1(-31.21,-554.74)
  Inner3 w3.1: v1(-122.32,-45.7) -120.49,-45.7 -100.16,-66.04 -90.45,-66.04 -77.65,-78.84 -77.65,-90.72 -77.65,-105.37 -80.93,-108.65 -100.22,-108.65 -103.49,-111.92 -103.49,-118.48 -100.22,-121.75 -78.38,-121.75 -75.1,-125.03 -75.1,-131.58 -78.38,-134.85 -100.22,-134.85 -103.49,-138.13 -103.49,-144.68 -100.22,-147.95 -80.93,-147.95 -77.65,-151.23 -77.65,-167.87 -77.65,-177.24 -83.09,-182.69 -83.09,-199.79 -91.45,-208.14 -91.45,-250.05 -101.55,-260.15 -101.55,-409.18 -88.38,-422.34 -88.38,-495.62 -87,-497 -85.9,-498.1 -80.79,-503.21 -76.15,-503.21 -73.71,-500.78 -69.08,-500.78 -64.45,-505.41 -64.45,-510.04 -79.29,-524.88 -79.29,-529.51 -74.66,-534.15 -70.03,-534.15 -55.19,-519.3 -50.55,-519.3 -45.92,-523.94 -45.92,-528.57 -56.19,-538.84 -56.19,-543.47 -51.56,-548.1 -46.93,-548.1 -43.73,-544.9 -39.1,-544.9 -38,-546 -31.21,-552.79 v1(-31.21,-554.74)
  Inner4 w3.09: v1(-169.04,-45.96) -168.91,-45.83 -122.45,-45.83 v1(-122.32,-45.7)
DDR_D3: U1.105 U2.H3 | length 867.7
  Top w3.63: U2.H3@-43.31,-413.39 -43.31,-448.58 -36.6,-455.29 v1(-36.6,-457.55) ; U1.105@45.28,-149.6 45.28,-154.94 45.28,-181.51 41.87,-184.92 31.83,-184.92 28.42,-188.33 28.42,-195.15 31.83,-198.56 47.06,-198.56 50.47,-201.96 50.47,-208.78 47.06,-212.19 37.54,-212.19 34.13,-215.6 34.13,-222.42 37.54,-225.82 51.01,-225.82 52.82,-227.64 62.62,-237.44 v1(62.62,-238.2)
  Inner3 w3.1: v1(62.62,-238.2) 62.62,-240.18 67.59,-245.15 67.59,-251.51 67.59,-259.19 64.31,-262.47 58.74,-262.47 55.46,-265.74 55.46,-272.3 58.74,-275.57 64.31,-275.57 67.59,-278.85 67.59,-285.4 64.31,-288.67 54.17,-288.67 50.9,-291.95 50.9,-298.5 54.17,-301.77 64.31,-301.77 67.59,-305.05 67.59,-306.6 67.59,-333.86 67.59,-344.58 64.31,-347.86 51.49,-347.86 48.21,-351.13 48.21,-357.68 51.49,-360.96 65.12,-360.96 68.4,-364.24 68.4,-370.79 65.12,-374.06 62.68,-374.06 59.41,-377.34 59.41,-383.89 62.68,-387.16 66.04,-387.16 70.87,-391.99 75.41,-396.53 75.41,-407.39 66.04,-416.76 66.04,-436.44 66.04,-453.33 69.31,-456.61 79.08,-456.61 82.36,-459.88 82.36,-466.43 79.08,-469.71 69.31,-469.71 66.04,-472.98 66.04,-487.64 66.04,-496.44 72.93,-503.33 v1(72.93,-504.62)
  Inner4 w3.09: v1(-36.6,-457.55) -34.19,-457.55 -31.12,-454.48 -29.47,-454.48 -14.84,-454.48 -11.57,-457.75 -11.57,-475.16 -8.3,-478.43 -1.76,-478.43 1.52,-475.16 1.52,-457.75 4.79,-454.48 22.79,-454.48 24.65,-456.35 26.89,-458.58 27.98,-459.67 32.61,-459.67 36.09,-456.19 40.72,-456.19 45.35,-460.82 45.35,-465.44 21.62,-489.16 21.62,-493.79 26.25,-498.42 30.88,-498.42 62.21,-467.08 66.84,-467.08 71.47,-471.71 71.47,-476.33 60.37,-487.43 60.37,-492.06 69.31,-501 v1(72.93,-504.62)
DDR_D4: U1.106 U2.H1 | length 902.5
  Top w3.63: v1(-136.84,-454.02) -136.21,-453.38 -123.57,-453.38 -121.94,-455.02 -109.26,-455.02 -106.24,-452 -66.58,-452 -57.13,-442.54 -57.13,-376.17 -43,-362.04 U2.H1@-43,-348 ; v1(30.08,-74.98) 39.99,-84.89 44.7,-84.89 55.12,-95.31 U1.106@55.12,-114.96
  Inner3 w3.1: v1(-174.26,-63.45) -172.56,-65.16 -163.71,-65.16 -155.86,-73.01 -155.86,-89.01 -152.87,-92 -152.87,-117.59 -156.15,-120.87 -159.6,-120.87 -162.87,-124.14 -162.87,-130.7 -159.6,-133.97 -151.17,-133.97 -147.89,-137.25 -147.89,-143.8 -151.17,-147.07 -156.55,-147.07 -159.83,-150.35 -159.83,-156.9 -156.55,-160.17 -156.15,-160.17 -152.87,-163.45 -152.87,-165 -152.87,-174.23 -154.48,-175.84 -154.48,-209.85 -151.86,-212.47 -151.86,-262.69 -154.63,-265.46 -154.63,-429.37 -142.92,-441.08 -142.92,-445.53 -136.84,-451.61 v1(-136.84,-454.02)
  Inner4 w3.09: v1(-174.26,-63.45) -142.96,-63.45 -136.75,-57.25 -80.61,-57.25 -78.27,-54.91 -68.11,-54.91 -63.83,-50.63 -39.8,-50.63 -23.03,-67.4 -0.19,-67.4 6.59,-74.18 29.28,-74.18 v1(30.08,-74.98)
DDR_D5: U1.73 U2.H9 | length 889.7
  Top w3.63: U1.73@-225.2,-51.18 -223.7,-52.68 -204.01,-52.68 v1(-202.51,-54.18) ; v1(-57.87,-583.81) -55.78,-585.9 -55.78,-589.89 U2.H9@-43.31,-602.36
  Inner3 w3.1: v1@-266.66,-282.33 -266.66,-181.85 -259.9,-175.1 -259.9,-169.55 -253.14,-162.79 -253.14,-129.24 -240.04,-116.14 -240.04,-107.19 -221.86,-89.01 -221.86,-73.53 v1(-202.51,-54.18) ; v1(-79.88,-284.74) -68.51,-296.11 -68.51,-342.57 -72.45,-346.51 -72.45,-358.45 -84.93,-370.94 -84.93,-405.71 -70.55,-420.09 -70.55,-460.74 -22.28,-509 -22.28,-532.17 -19.66,-534.79 -19.66,-559.66 -44.57,-584.57 -57.11,-584.57 v1(-57.87,-583.81)
  Inner4 w3.09: v1(-266.69,-282.36) -266.17,-282.88 -192.42,-282.88 -177.79,-282.88 -174.52,-286.15 -174.52,-287.76 -171.25,-291.03 -164.7,-291.03 -161.43,-287.76 -161.43,-283.56 -158.16,-280.28 -151.62,-280.28 -148.34,-283.56 -148.34,-287.76 -145.07,-291.03 -138.53,-291.03 -135.26,-287.76 -135.26,-283.56 -131.99,-280.28 -125.44,-280.28 -122.17,-283.56 -122.17,-287.76 -118.9,-291.03 -112.36,-291.03 -109.09,-287.76 -109.09,-286.15 -105.81,-282.88 -88.03,-282.88 -86.25,-282.88 -86.1,-283.03 -81.59,-283.03 v1(-79.88,-284.74)
DDR_D6: U1.109 U2.F1 | length 891.6
  Top w3.63: v1(-205.54,-460.56) -203.28,-460.56 -196.85,-466.99 -191.2,-466.99 -175.2,-482.99 -77.94,-482.99 -73.71,-487.22 -30.22,-487.22 2.01,-454.99 2.01,-368.07 U2.F1@19.68,-350.39 ; v1(59.75,-191.13) 59.75,-188.93 75.52,-173.16 80.84,-173.16 84.65,-169.35 U1.109@84.65,-149.6
  Inner3 w3.1: v1(-205.54,-460.56) -205.54,-429.62 -203.53,-427.61 -203.53,-398.18 -206,-395.71 -206,-351.89 -208.3,-349.59 -208.3,-329.82 -206.37,-327.9 -206.37,-278.84 -185.01,-257.47 -185.01,-255.28 -178.29,-248.56 v1(-178.29,-246.93)
  Inner4 w3.09: v1(-178.29,-246.93) -176.34,-246.93 -167.95,-238.54 -153.82,-238.54 -140.28,-225.01 -69.2,-225.01 -68.86,-225.35 29.69,-225.35 54.08,-200.96 54.08,-197.3 59.75,-191.63 v1(59.75,-191.13)
DDR_D7: U1.70 U2.F9 | length 957.2
  Top w3.63: v1(-281.03,-21.28) -280.85,-21.47 -260.03,-21.47 U1.70@-259.84,-21.65 ; U2.F9@20,-600.72 20.3,-600.72 33,-588.02 v1(33,-587)
  Inner3 w3.1: v1(19.62,-60.33) 31.77,-60.33 41.63,-70.19 41.63,-89.13 45.86,-93.35 45.86,-139.31 48.06,-141.52 48.06,-222.47 38.23,-232.31 38.23,-275.04 43.79,-280.6 43.79,-326.48 41.11,-329.16 41.11,-369.63 52.3,-380.82 52.3,-411.39 58.94,-418.02 58.94,-489.54 56,-492.48 56,-564 v1(33,-587)
  Inner4 w3.09: v1(-281.03,-21.28) -280.66,-21.65 -236.57,-21.65 -232.57,-17.65 -192.17,-17.65 -174.48,0.05 -43.35,0.05 -35.17,-8.14 -35.17,-19.45 -28.43,-26.18 -7.81,-26.18 18.35,-52.35 18.35,-59.07 v1(19.62,-60.33)
DDR_D8: U1.66 U2.C8 | length 954.8
  Top w3.63: v1(-279.19,15.22) -277.94,16.47 -261.09,16.47 U1.66@-259.84,17.72 ; v1(99.2,-552.71) 99.2,-554.3 114.17,-569.27 U2.C8@114.17,-570.87
  Inner3 w3.1: v1(47.15,-41.5) 47.94,-41.5 88.59,-82.15 88.59,-117.28 93.3,-121.98 93.3,-202.84 95.99,-205.54 95.99,-351.66 98.84,-354.5 98.84,-379.79 103.81,-384.76 110.76,-391.71 110.76,-541.14 v1(99.2,-552.71)
  Inner4 w3.09: v1(-279.19,15.22) -197.3,15.24 -192.93,19.61 -184.98,19.61 -182.99,21.6 4.75,21.6 31.76,-5.42 31.76,-16.59 46.04,-30.87 46.04,-40.38 v1(47.15,-41.5)
DDR_D9: U1.112 U2.C2 | length 896.4
  Top w3.63: U2.C2@114.17,-381.89 115.67,-383.39 115.67,-395.34 131.85,-411.52 131.85,-419.11 147.74,-435 161.52,-435 166.97,-429.55 v1(169.24,-429.55) ; U1.112@114.17,-114.96 114.17,-70.96 120.59,-64.54 120.59,-32.74 108.43,-20.58 108.43,-10.79 116.22,-3 134.34,-3 v1(135.25,-3.91)
  Inner3 w3.1: v1(135.25,-3.91) 135.25,-6.31 139,-10.07 139,-19.98 139,-21.54 142.28,-24.81 142.98,-24.81 146.26,-28.09 146.26,-34.64 142.98,-37.91 131.43,-37.91 128.16,-41.19 128.16,-47.74 131.43,-51.01 138.38,-51.01 141.65,-54.29 141.65,-60.84 138.38,-64.12 131.43,-64.12 128.16,-67.39 128.16,-73.94 131.43,-77.22 135.72,-77.22 139,-80.49 139,-95 140.75,-96.75 157.26,-113.26 157.26,-116.39 166.49,-125.63 166.49,-130.48 166.49,-132.03 169.77,-135.31 170.62,-135.31 173.9,-138.58 173.9,-145.13 170.62,-148.41 166.78,-148.41 163.5,-151.68 163.5,-158.23 166.78,-161.51 168.68,-161.51 171.96,-164.78 171.96,-171.34 168.68,-174.61 166.78,-174.61 163.5,-177.89 163.5,-184.44 166.78,-187.71 176.62,-187.71 179.9,-190.99 179.9,-197.54 176.62,-200.81 166.78,-200.81 163.5,-204.09 163.5,-210.64 166.78,-213.92 176.62,-213.92 179.9,-217.19 179.9,-223.74 176.62,-227.02 169.77,-227.02 166.49,-230.29 166.49,-287.88 171.22,-292.62 178.92,-300.31 178.92,-304.48 178.92,-319.13 175.64,-322.41 163.58,-322.41 160.31,-325.68 160.31,-332.23 163.58,-335.51 176.62,-335.51 179.9,-338.78 179.9,-345.33 176.62,-348.61 163.58,-348.61 160.31,-351.89 160.31,-358.44 163.58,-361.71 181.17,-361.71 184.45,-364.99 184.45,-371.54 181.17,-374.81 177.9,-374.81 174.63,-378.09 174.63,-384.64 177.9,-387.91 193.55,-387.91 196.83,-391.19 196.83,-397.74 193.55,-401.02 182.19,-401.02 178.92,-404.29 178.92,-414.97 178.92,-419.87 v1(169.24,-429.55)
DDR_D10: U1.68 U2.D7 | length 902.4
  Top w3.63: v1(-280,-2.76) -279.6,-2.36 -260.4,-2.36 U1.68@-260.02,-1.98 ; v1(67.55,-527.71) 69.28,-527.71 80.95,-539.37 U2.D7@82.68,-539.37
  Inner3 w3.1: v1(53.18,-76.66) 52.96,-76.88 52.96,-108.1 56.9,-112.04 56.9,-147.03 71.84,-161.97 71.84,-211.51 74.69,-214.36 74.69,-360.48 77.54,-363.33 77.54,-388.62 82.51,-393.59 89.46,-400.54 89.46,-505.8 v1(67.55,-527.71)
  Inner4 w3.09: v1(-280,-2.76) -278.28,-2.76 -270.48,-10.56 -195.11,-10.56 -177.12,7.42 -26.53,7.42 28.52,-47.63 28.52,-49.21 39.44,-60.13 48.97,-60.13 53.18,-64.34 v1(53.18,-76.66)
DDR_D11: U1.110 U2.D3 | length 907.1
  Top w3.63: U2.D3@83.29,-414 97.52,-428.23 97.52,-438.52 110,-451 125.45,-451 128.86,-454.41 128.86,-457.59 132.27,-461 139.09,-461 142.5,-457.59 142.5,-452.39 145.9,-448.98 152.72,-448.98 156.13,-452.39 156.13,-457.59 159.54,-461 166.36,-461 169.76,-457.59 169.76,-454.41 173.17,-451 182.76,-451 194.47,-451 v1(201.74,-443.73) ; U1.110@94.49,-114.96 94.49,-96.66 106.54,-84.61 106.54,-63.46 112.95,-57.04 112.95,-35.9 98.55,-21.49 98.55,16.55 v1(115,33)
  Inner3 w3.1: v1(115,33) 106.45,24.45 106.45,-22.37 117,-32.92 117,-36 117,-43.67 113.72,-46.94 111.33,-46.94 108.05,-50.22 108.05,-56.77 111.33,-60.04 113.72,-60.04 117,-63.32 117,-105.51 125.49,-114 126.25,-114.75 127.34,-115.85 131.97,-115.85 134.41,-113.41 139.05,-113.41 143.68,-118.04 143.68,-122.68 141.24,-125.12 141.24,-129.75 141.65,-130.16 142.75,-131.25 156.4,-144.91 156.4,-270.97 150.77,-276.6 150.35,-277.02 150.35,-381.09 155.82,-386.55 155.82,-408.22 157.69,-410.09 157.69,-434.69 166.73,-443.73 v1(201.74,-443.73)
DDR_D12: U1.111 U2.D1 | length 853.5
  Top w3.63: v1(-233.64,-316.77) -233.4,-316.53 -233.4,-259.29 v1(-232.7,-258.6) ; v1(56.04,-315.3) 72.11,-331.37 72.11,-339.83 78.64,-346.36 U2.D1@80.37,-346.36 ; U1.111@104.33,-149.6 104.99,-150.26 104.99,-182.74 v1(106.25,-184)
  Inner4 w3.09: v1(-233.64,-316.77) -233.08,-316.21 -233.08,-308.47 -222.73,-298.12 -73.69,-298.12 -62,-309.81 -52.53,-309.81 -42.92,-300.2 38.92,-300.2 54.02,-315.3 v1(56.04,-315.3) ; v1(-232.7,-258.6) -232.7,-259.31 -218.82,-273.2 -32.75,-273.2 -24.82,-265.27 56.05,-265.27 102.77,-218.54 102.77,-201.82 106.25,-198.34 v1(106.25,-184)
DDR_D13: U1.67 U2.D9 | length 919.3
  Top w3.63: U1.67@-225.2,7.88 -207.65,7.88 -200.76,0.98 v1(-200.48,0.98) ; v1(69,-589) 69.31,-589 U2.D9@82.68,-602.36
  Inner3 w3.1: v1(65.76,-90.16) 67.12,-91.53 67.12,-96.21 67.51,-96.59 67.51,-147.59 78.94,-159.03 78.94,-208.57 81.79,-211.42 81.79,-357.54 84.64,-360.39 84.64,-385.68 89.61,-390.65 96.56,-397.6 96.56,-509.16 81.9,-523.82 81.9,-532.61 87.48,-538.19 87.48,-570.52 v1(69,-589)
  Inner4 w3.09: v1(-200.48,0.98) -200.15,0.98 -191.18,9.96 -184.61,9.96 -180.06,14.51 1.82,14.51 24.68,-8.35 24.68,-19.53 35.61,-30.46 35.61,-46.28 42.37,-53.04 51.9,-53.04 66.04,-67.18 66.04,-89.88 v1(65.76,-90.16)
DDR_D14: U1.114 U2.B1 | length 907.2
  Top w3.63: v1(120.25,-15.68) 120.25,-15.98 133.86,-29.59 133.86,-40.66 133.86,-61.24 137.27,-64.65 138.5,-64.65 141.91,-68.06 141.91,-74.87 138.5,-78.28 126.62,-78.28 123.21,-81.69 123.21,-88.51 126.62,-91.92 130.45,-91.92 133.86,-95.33 133.86,-97.14 U1.114@133.86,-114.96 ; U2.B1@145.67,-350.39 162.27,-367 v1(196,-367)
  Inner3 w3.1: v1(120.25,-15.68) 119.34,-14.77 119.34,-3.48 130.46,7.65 140.03,7.65 149.95,-2.28 169.28,-2.28 181,-14 181,-18 181,-19.55 184.28,-22.83 187.4,-22.83 190.68,-26.1 190.68,-32.65 187.4,-35.93 174.28,-35.93 171,-39.2 171,-45.75 174.28,-49.03 187.4,-49.03 190.68,-52.3 190.68,-58.86 187.4,-62.13 174.28,-62.13 171,-65.41 171,-71.96 174.28,-75.23 187.4,-75.23 190.68,-78.51 190.68,-85.06 187.4,-88.33 178.24,-88.33 174.97,-91.61 174.97,-98.16 178.24,-101.44 187.4,-101.44 190.68,-104.71 190.68,-111.26 187.4,-114.54 183.63,-114.54 180.36,-117.81 180.36,-124.36 183.63,-127.64 187.4,-127.64 190.68,-130.91 190.68,-137.46 187.4,-140.74 184.28,-140.74 181,-144.02 181,-149 181,-151 196,-166 196,-173 196,-182.58 192.72,-185.85 190.27,-185.85 187,-189.13 187,-195.68 190.27,-198.96 199.32,-198.96 202.6,-202.23 202.6,-208.78 199.32,-212.06 190.27,-212.06 187,-215.33 187,-221.88 190.27,-225.16 200.11,-225.16 203.39,-228.43 203.39,-234.98 200.11,-238.26 190.78,-238.26 187.51,-241.54 187.51,-248.09 190.78,-251.36 198.99,-251.36 202.27,-254.64 202.27,-261.19 198.99,-264.46 193.39,-264.46 190.11,-267.74 190.11,-274.29 193.39,-277.56 206.32,-277.56 209.6,-280.84 209.6,-287.39 206.32,-290.67 192.41,-290.67 189.13,-293.94 189.13,-300.49 192.41,-303.77 206.32,-303.77 209.6,-307.04 209.6,-313.59 206.32,-316.87 190.27,-316.87 187,-320.14 187,-326.7 190.27,-329.97 195.32,-329.97 198.59,-333.25 198.59,-339.8 195.32,-343.07 190.27,-343.07 187,-346.35 187,-352.9 190.27,-356.17 192.72,-356.17 196,-359.45 196,-361 v1(196,-367)
DDR_D15: U1.65 U2.B9 | length 952.5
  Top w3.63: U1.65@-225.2,27.56 -224.86,27.22 -202.32,27.22 v1(-201.98,26.89) ; v1(132,-590) 132.65,-590 145.01,-602.36 U2.B9@145.67,-602.36
  Inner3 w3.1: v1(65.15,-41.5) 66,-42.34 66,-49.51 95.7,-79.21 95.7,-114.33 107.8,-126.44 107.8,-169.22 117.8,-179.22 117.8,-188.79 111.42,-195.16 109.53,-195.16 103.1,-201.59 103.1,-335.37 105.94,-338.22 105.94,-376.85 110.91,-381.82 117.86,-388.77 117.86,-405.29 118.11,-405.53 118.11,-517.65 141,-540.54 141,-581 v1(132,-590)
  Inner4 w3.09: v1(-201.98,26.89) -200.17,26.89 -195.72,31.35 8.43,31.35 40.04,-0.27 48.09,-0.27 64.07,-16.25 64.07,-40.42 v1(65.15,-41.5)
DDR_LDM: U1.108 U2.F3 | length 902.6
  Top w3.63: U2.F3@19.68,-413.39 33.54,-427.25 42.36,-427.25 85.82,-470.7 173.7,-470.7 180.4,-464 v1(206,-464) ; U1.108@74.8,-114.96 75.87,-113.89 75.87,-97.93 98.9,-74.9 98.9,-60.1 101.14,-57.86 v1(101.14,-40.79)
  Inner3 w3.1: v1(101.14,-40.79) 100.95,-40.98 100.95,-59.71 109.9,-68.66 109.9,-108.45 120.1,-118.65 126.05,-124.6 133.3,-131.85 133.3,-135.78 133.3,-221.74 136.57,-225.01 142.93,-225.01 146.21,-228.29 146.21,-234.84 142.93,-238.11 127.67,-238.11 124.4,-241.39 124.4,-247.94 127.67,-251.22 142.93,-251.22 146.21,-254.49 146.21,-261.04 142.93,-264.32 127.67,-264.32 124.4,-267.59 124.4,-274.14 127.67,-277.42 137.12,-277.42 140.4,-280.69 140.4,-287.24 137.12,-290.52 127.67,-290.52 124.4,-293.8 124.4,-300.35 127.67,-303.62 137.12,-303.62 140.4,-306.9 140.4,-313.45 137.12,-316.72 127.67,-316.72 124.4,-320 124.4,-326.55 127.67,-329.82 130.02,-329.82 133.3,-333.1 133.3,-334.65 133.3,-335.84 143.25,-345.79 143.25,-384.03 148.07,-388.85 148.07,-410.51 150.59,-413.03 150.59,-444.81 169.78,-464 v1(206,-464)
DDR_LDQS: U1.113 U2.F7 | length 866.8
  Top w3.63: v1(8,-524) 8,-525.72 20,-537.72 U2.F7@20,-538 ; v1(114.65,-206.71) 114.65,-206.62 124.02,-197.25 U1.113@124.02,-149.6
  Inner3 w3.1: v1(114.65,-206.71) 113.04,-208.31 113.04,-232.66 110.2,-235.51 110.2,-332.43 113.04,-335.28 113.04,-373.91 118.02,-378.88 124.97,-385.83 124.97,-402.35 143.48,-420.87 143.48,-431.47 143.48,-447.75 157.04,-461.31 157.04,-465.94 146.92,-476.06 146.92,-480.69 151.56,-485.32 156.19,-485.32 168.1,-473.42 172.73,-473.42 177.36,-478.05 177.36,-482.68 165.45,-494.59 165.45,-499.22 170.09,-503.85 174.72,-503.85 184.84,-493.73 189.47,-493.73 190.57,-494.83 192.74,-497 v1(203,-497)
  Inner4 w3.09: v1(8,-524) 15.84,-516.16 21.48,-516.16 23.03,-516.16 26.3,-512.89 26.3,-508.78 29.57,-505.5 36.11,-505.5 39.39,-508.78 39.39,-526.79 42.66,-530.06 49.2,-530.06 52.47,-526.79 52.47,-519.43 55.74,-516.16 101.55,-516.16 104.82,-512.89 104.82,-496.51 108.09,-493.24 114.63,-493.24 117.9,-496.51 117.9,-526.79 121.18,-530.06 127.72,-530.06 130.99,-526.79 130.99,-496.51 134.26,-493.24 140.81,-493.24 144.08,-496.51 144.08,-512.89 147.35,-516.16 153.63,-516.16 163.14,-525.67 171.38,-533.91 190.74,-533.91 203,-521.65 v1(203,-497)
DDR_ODT: U1.74 U2.K9 | length 918.1
  Top w3.63: v1(-284,-78.28) -284,-66 -279.02,-61.02 U1.74@-259.84,-61.02 ; v1(-106,-621) -106.15,-620.85 -106.15,-601.15 U2.K9@-106,-601
  Inner3 w3.1: v1(-334.79,-570) -334.79,-556.49 -334.79,-554.94 -338.06,-551.66 -341.51,-551.66 -344.79,-548.39 -344.79,-541.84 -341.51,-538.56 -336.36,-538.56 -333.09,-535.29 -333.09,-528.74 -336.36,-525.46 -341.51,-525.46 -344.79,-522.18 -344.79,-515.63 -341.51,-512.36 -338.06,-512.36 -334.79,-509.08 -334.79,-490.14 -334.79,-483.75 -315.3,-464.27 -315.3,-340.3 -300.36,-325.36 -300.36,-259.04 -289,-247.68 -289,-174.07 -285.65,-170.72 -285.65,-164.69 -281.77,-160.81 -280.22,-159.26 -280.22,-154.63 -283.49,-151.35 -285.73,-151.35 -289,-148.08 -289,-141.52 -285.73,-138.25 -277.72,-138.25 -274.45,-134.97 -274.45,-128.42 -277.72,-125.15 -286.03,-125.15 -289.31,-121.87 -289.31,-115.32 -286.03,-112.05 -277.72,-112.05 -274.45,-108.77 -274.45,-89.87 -274.45,-85.99 -282.16,-78.28 v1(-284,-78.28)
  Inner4 w3.09: v1(-334.79,-570) -304.24,-600.54 -259.12,-600.54 -246.25,-587.68 -205.22,-587.68 -165.56,-627.33 -146.28,-627.33 -129.59,-610.64 -116.36,-610.64 v1(-106,-621)
DDR_RAS: U1.81 U2.K7 | length 883.6
  Top w3.63: v1(-240.4,-135.79) -240.6,-135.99 -240.6,-160.31 -227.68,-173.23 -196.85,-173.23 -190.95,-167.32 U1.81@-190.95,-149.6 ; U2.K7@-106.3,-539.37 -106.3,-542.72 -98.79,-550.22 -98.79,-558.21 -88.62,-568.38 -88.62,-584.3 v1(-87.09,-585.83)
  Inner3 w3.1: v1(-120.23,-82.96) -120.23,-130.52 -124.15,-134.43 -124.15,-183.19 -118.77,-188.57 -118.77,-213.56 -121.65,-216.45 -121.65,-270.77 -116.22,-276.2 -116.22,-414.59 -102.59,-428.23 -102.59,-501.68 -106.12,-505.21 -106.12,-568.5 -88.79,-585.83 v1(-87.09,-585.83)
  Inner4 w3.09: v1(-240.4,-135.79) -239.78,-136.4 -213.42,-136.4 -211.88,-136.4 -208.6,-133.13 -208.6,-125.26 -205.33,-121.99 -198.79,-121.99 -195.52,-125.26 -195.52,-133.13 -192.25,-136.4 -185.7,-136.4 -182.43,-133.13 -182.43,-125.26 -179.16,-121.99 -172.62,-121.99 -169.34,-125.26 -169.34,-133.13 -166.07,-136.4 -144.52,-136.4 -142.2,-136.4 -120.23,-114.43 v1(-120.23,-82.96)